# EAGLE board Placa (EAGLE 9.3.0)
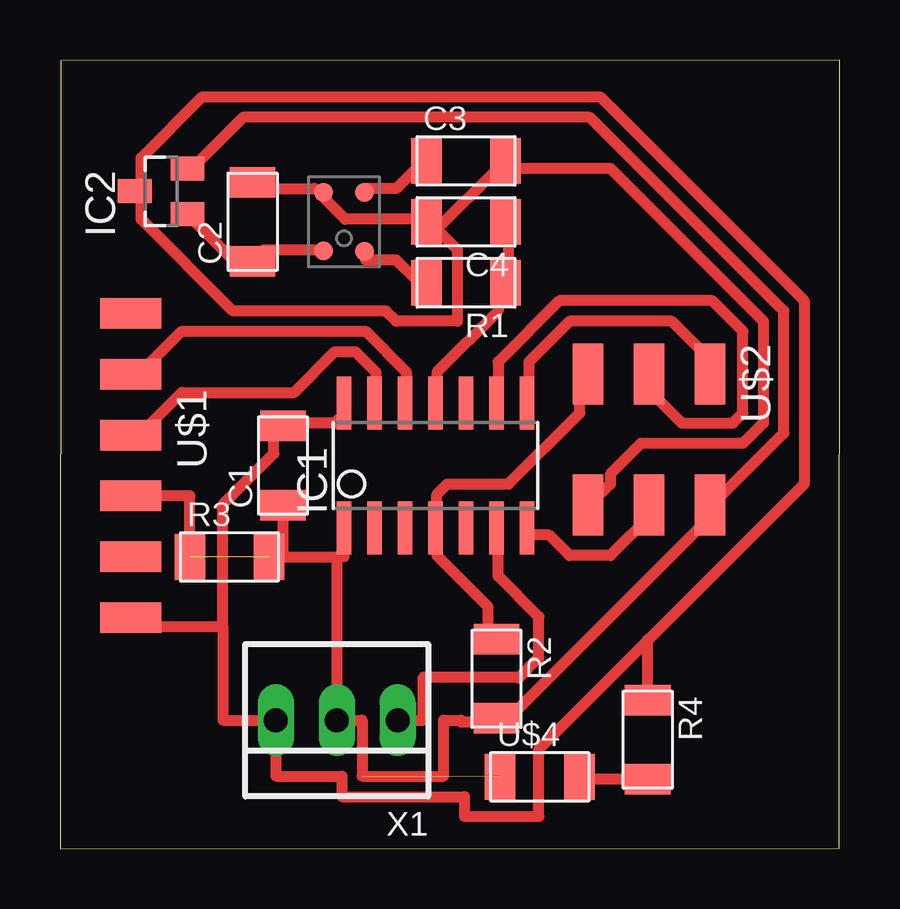
[diagram p0: board, top side]

Size 32.49 x 32.88 mm. Coordinates in mm from the lower left corner, seen from the top.
Outline: 0,0 32.46,0.03 32.49,32.88 0.03,32.86 0,0
Copper layers (1*16): Top 0.035mm / dielectric 1.5mm / Bottom 0.035mm
Design rules "default *": minimum track width 0.45mm, minimum drill 0.35mm, track to track 0.4mm, track to pad 0.4mm, pad to pad 0.4mm, via to via 0.4mm, smd to smd 0.4mm, copper to edge 40mil, drill to drill 6mil, minimum pad ring 10mil, minimum via ring 8mil, stop-mask expansion 4mil, vias tented up to drill 0mil, thermal gap 10mil

## Footprints (pad centres in the part's own frame; a part is rotated, then mirrored left to right if it is on the bottom)
C1206FAB = smd 1.27 x 1.905: 1 -1.651,0; 2 1.651,0
SOIC14 = smd 0.61 x 2.21: 1 -3.81,-2.603; 2 -2.54,-2.603; 3 -1.27,-2.603; 4 0,-2.603; 5 1.27,-2.603; 6 2.54,-2.603; 7 3.81,-2.603; 8 3.81,2.603; 9 2.54,2.603; 10 1.27,2.603; 11 0,2.603; 12 -1.27,2.603; 13 -2.54,2.603; 14 -3.81,2.603
SOT23 = smd 1 x 1.4: 1 -0.95,-1.1; 2 0.95,-1.1; 3 0,1.1
R1206FAB = smd 1.27 x 1.905: 1 -1.651,0; 2 1.651,0
1X06SMD = smd 2.54 x 1.27: 1 0,6.35; 2 0,3.81; 3 0,1.27; 4 0,-1.27; 5 0,-3.81; 6 0,-6.35
2X03SMD = smd 2.54 x 1.27: 1 -2.54,2.54; 2 2.92,2.54; 3 -2.54,0; 4 2.92,0; 5 -2.54,-2.54; 6 2.92,-2.54
CSP-4PIN = smd 0.8 x 0.8: P$1 0.855,1.215; P$2 0.85,-1.23; P$3 -0.85,-1.23; P$4 -0.85,1.23
LED1206FAB = smd 1.27 x 1.905: 1 -1.651,0; 2 1.651,0
22-23-2031 = drill 1 long: 1 -2.54,0; 2 0,0; 3 2.54,0

## Placement (x,y rotation side)
C1  1uF  [C1206FAB]  9.3,15.98 90 top
C2  0.1uF  [C1206FAB]  8.03,26.14 90 top
C3  10uF  [C1206FAB]  16.92,28.68 0 top
C4  0.1uF  [C1206FAB]  16.92,26.14 180 top
IC1  ATTINY44-SSU  [SOIC14]  15.65,15.98 0 top
IC2  [SOT23]  4.22,27.41 90 top
R1  1K  [R1206FAB]  16.92,23.6 180 top
R2  10K  [R1206FAB]  18.19,7.09 270 top
R3  0  [R1206FAB]  7.06,12.17 0 top
R4  499  [R1206FAB]  24.49,4.55 270 top
U$1  FTDI-SMD-HEADER  [1X06SMD]  2.95,15.98 180 top
U$2  AVRISPSMD  [2X03SMD]  24.54,17.25 270 top
U$3  MEMS_MIC_SPU0414HR5H-SB  [CSP-4PIN]  11.84,26.14 180 top
U$4  LEDFAB1206  [LED1206FAB]  19.99,3 0 top
X1  22-23-2031  [22-23-2031]  11.53,5.36 180 top

## Library data of the parts
C1-C4 IC1 IC2 R1-R4 U$1-U$4 = fab
X1 = con-molex; MF: MOLEX; MPN: 22-23-2031; OC_FARNELL: 1462950; OC_NEWARK: 30C0862

## Nets
0: C1.2 C2.2 C3.2 C4.2 IC1.14 IC2.3 R4.1 U$1.1 U$2.6 U$3.P$2 X1.3
3.3V: C2.1 IC2.1 U$3.P$1
MEMS: C4.1 IC1.11 R1.1
MISO: IC1.8 U$2.1
MOSI: IC1.7 U$2.4
N$1: R1.2 U$3.P$4
N$2: C3.1 U$3.P$3
N$4: R4.2 U$4.2
N$5: IC1.5
N$6: IC1.3
N$7: IC1.2
N$12: IC1.10
RST: IC1.4 R2.1 U$2.5
RX: IC1.12 U$1.5
SCK: IC1.9 U$2.3
SERVO: IC1.6 X1.1
TX: IC1.13 U$1.4
VCC: C1.1 IC1.1 IC2.2 R2.2 R3.1 R3.2 U$1.3 U$2.2 U$4.1 X1.2

## Tracks (layer width: path | path; a pad name or v marks a point on that pad's centre or on a via)
0
  Top 0.45: IC1.14 11.88,18.17 11.46,17.75 9.33,17.75 C1.2 8.91,17.32 8.91,16.47 6.78,14.35 6.78,9.25 | 6.78,9.25 2.96,9.25 U$1.1 | C2.2 8.06,27.52 10.61,27.52 U$3.P$2 11.03,27.1 11.88,26.25 14.86,26.25 C4.2 | 15.71,25.82 15.28,26.25 C4.2 | 15.71,25.82 16.56,24.97 16.56,22 14.01,22 13.58,22.42 7.21,22.42 3.38,26.25 3.38,27.1 IC2.3 3.38,27.52 3.38,28.8 5.93,31.35 22.51,31.35 31.01,22.85 31.01,15.2 24.52,8.71 | 15.71,25.82 18.26,28.37 C3.2 18.68,28.37 22.93,28.37 29.31,22 29.31,17.75 28.46,16.9 24.21,16.9 22.93,15.62 22.93,15.2 22.08,14.35 U$2.6 | 15.71,25.82 C4.2 | 24.52,8.71 19.96,4.15 19.96,1.34 16.85,1.34 16.85,2.17 11.74,2.17 11.74,3.02 8.99,3.02 X1.3 6.78,5.36 6.78,9.25 | R4.1 24.49,8.71 24.52,8.71
3.3V
  Top 0.45: U$3.P$1 10.61,24.97 8.48,24.97 8.06,24.55 C2.1 7.63,24.12 5.51,26.25 IC2.1
MEMS
  Top 0.45: C4.1 18.68,25.82 18.68,23.7 R1.1 18.26,23.27 18.26,22.42 15.71,19.87 15.71,18.6 IC1.11
MISO
  Top 0.45: IC1.8 19.53,18.6 19.53,20.3 21.23,22 25.48,22 26.76,20.72 26.76,19.87 U$2.1
MOSI
  Top 0.45: IC1.7 19.53,13.07 20.38,13.07 21.23,12.22 22.93,12.22 24.63,13.92 U$2.4
N$1
  Top 0.45: U$3.P$4 12.73,24.55 14.01,24.55 14.86,23.7 R1.2
N$2
  Top 0.45: U$3.P$3 12.73,27.52 14.01,27.52 14.86,28.37 C3.1
N$4
  Top 0.45: R4.2 21.64,2.9 U$4.2
RST
  Top 0.45: R2.1 17.83,8.82 17.83,10.1 15.71,12.22 15.71,13.07 IC1.4 15.71,13.5 15.71,14.77 16.13,15.2 18.68,15.2 21.66,18.17 21.66,19.45 U$2.5
RX
  Top 0.45: IC1.12 14.43,18.6 14.43,19.87 12.73,21.57 5.08,21.57 2.96,19.45 U$1.5
SCK
  Top 0.45: IC1.9 18.26,18.6 18.26,20.3 20.81,22.85 27.18,22.85 28.46,21.57 28.46,18.17 28.03,17.75 25.91,17.75 24.21,19.45 U$2.3
SERVO
  Top 0.45: IC1.6 18.26,13.07 18.26,11.37 19.96,9.67 19.96,7.97 19.11,7.12 19.11,7.16 15.14,7.16 15.14,5.36 X1.1
TX
  Top 0.45: IC1.13 13.16,18.6 13.16,19.87 12.31,20.72 11.46,20.72 9.76,19.02 5.08,19.02 2.96,16.9 U$1.4
VCC  (2 unrouted)
  Top 0.45: 9.33,13.92 C1.1 9.3,12.17 R3.2 11.53,12.17 | 11.88,13.5 IC1.1 | 17.83,5.85 R2.2 | 11.88,13.07 IC1.1 | IC2.2 5.51,28.37 7.63,30.5 22.08,30.5 30.16,22.42 30.16,17.32 27.18,14.35 U$2.2 27.18,13.92 19.11,5.85 18.26,5.85 R2.2 | R3.1 5.41,14.71 U$1.3 | IC1.1 11.84,12.17 11.53,12.17 | 11.53,12.17 X1.2 12.59,5.36 12.59,3.02 15.99,3.02 15.99,5.36 16.71,5.36 16.71,5.28 18.19,5.28 R2.2